# Altium PCB Capstone_Signal_Conditioning_Subsystem_Test_PCB.PcbDoc
Units mm, origin at the board's own origin, x right, y up, seen from the top; angles counter-clockwise.
Board outline 94.23 x 82.3 mm, 2 copper layers (Top Layer, Bottom Layer), stack 0.532 mm thick; 69 components, 68 nets, 259 pads, 87 vias.
Unrouted connection lines stored in the file: 48.
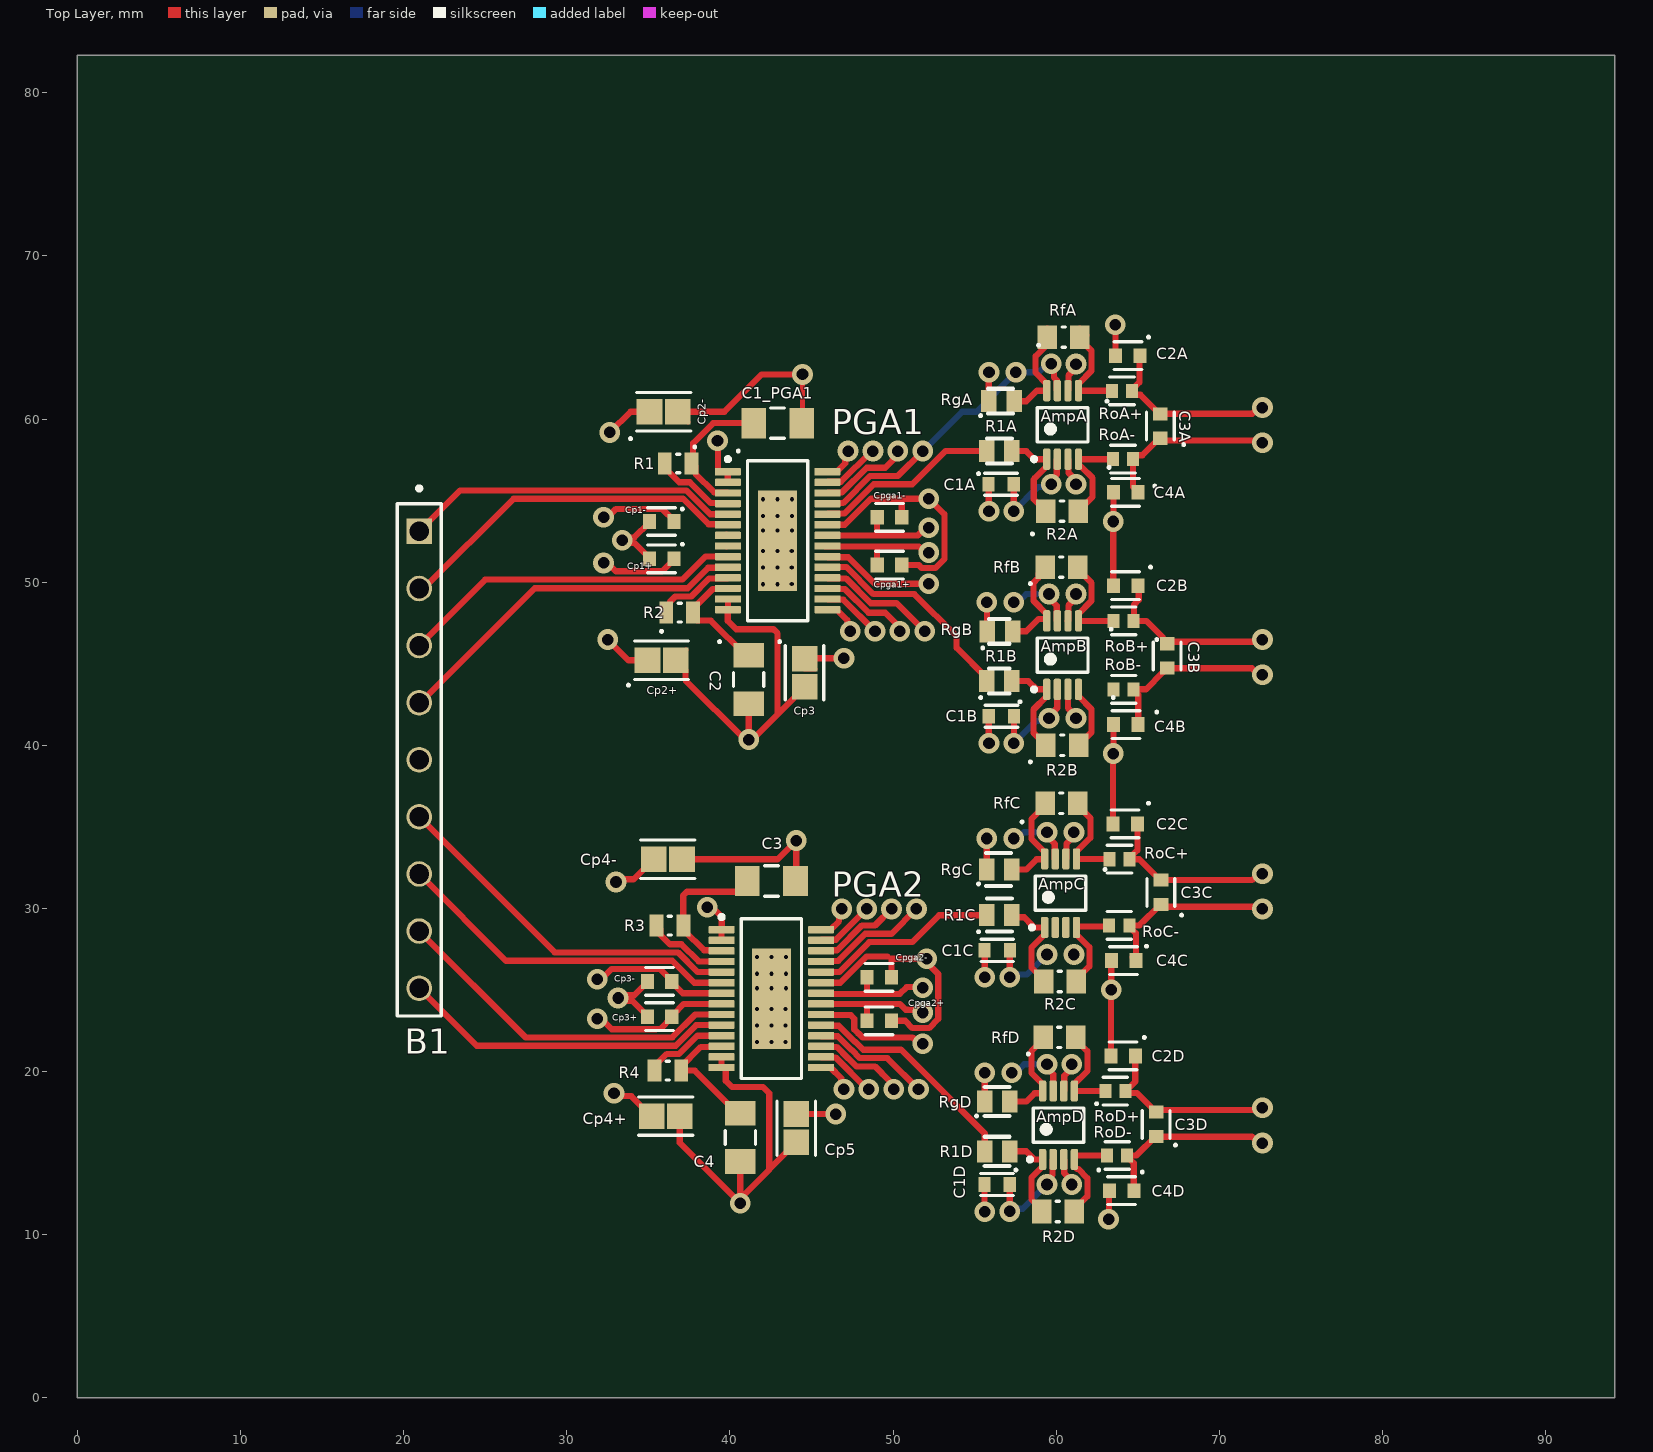
[diagram p0: Top Layer view]
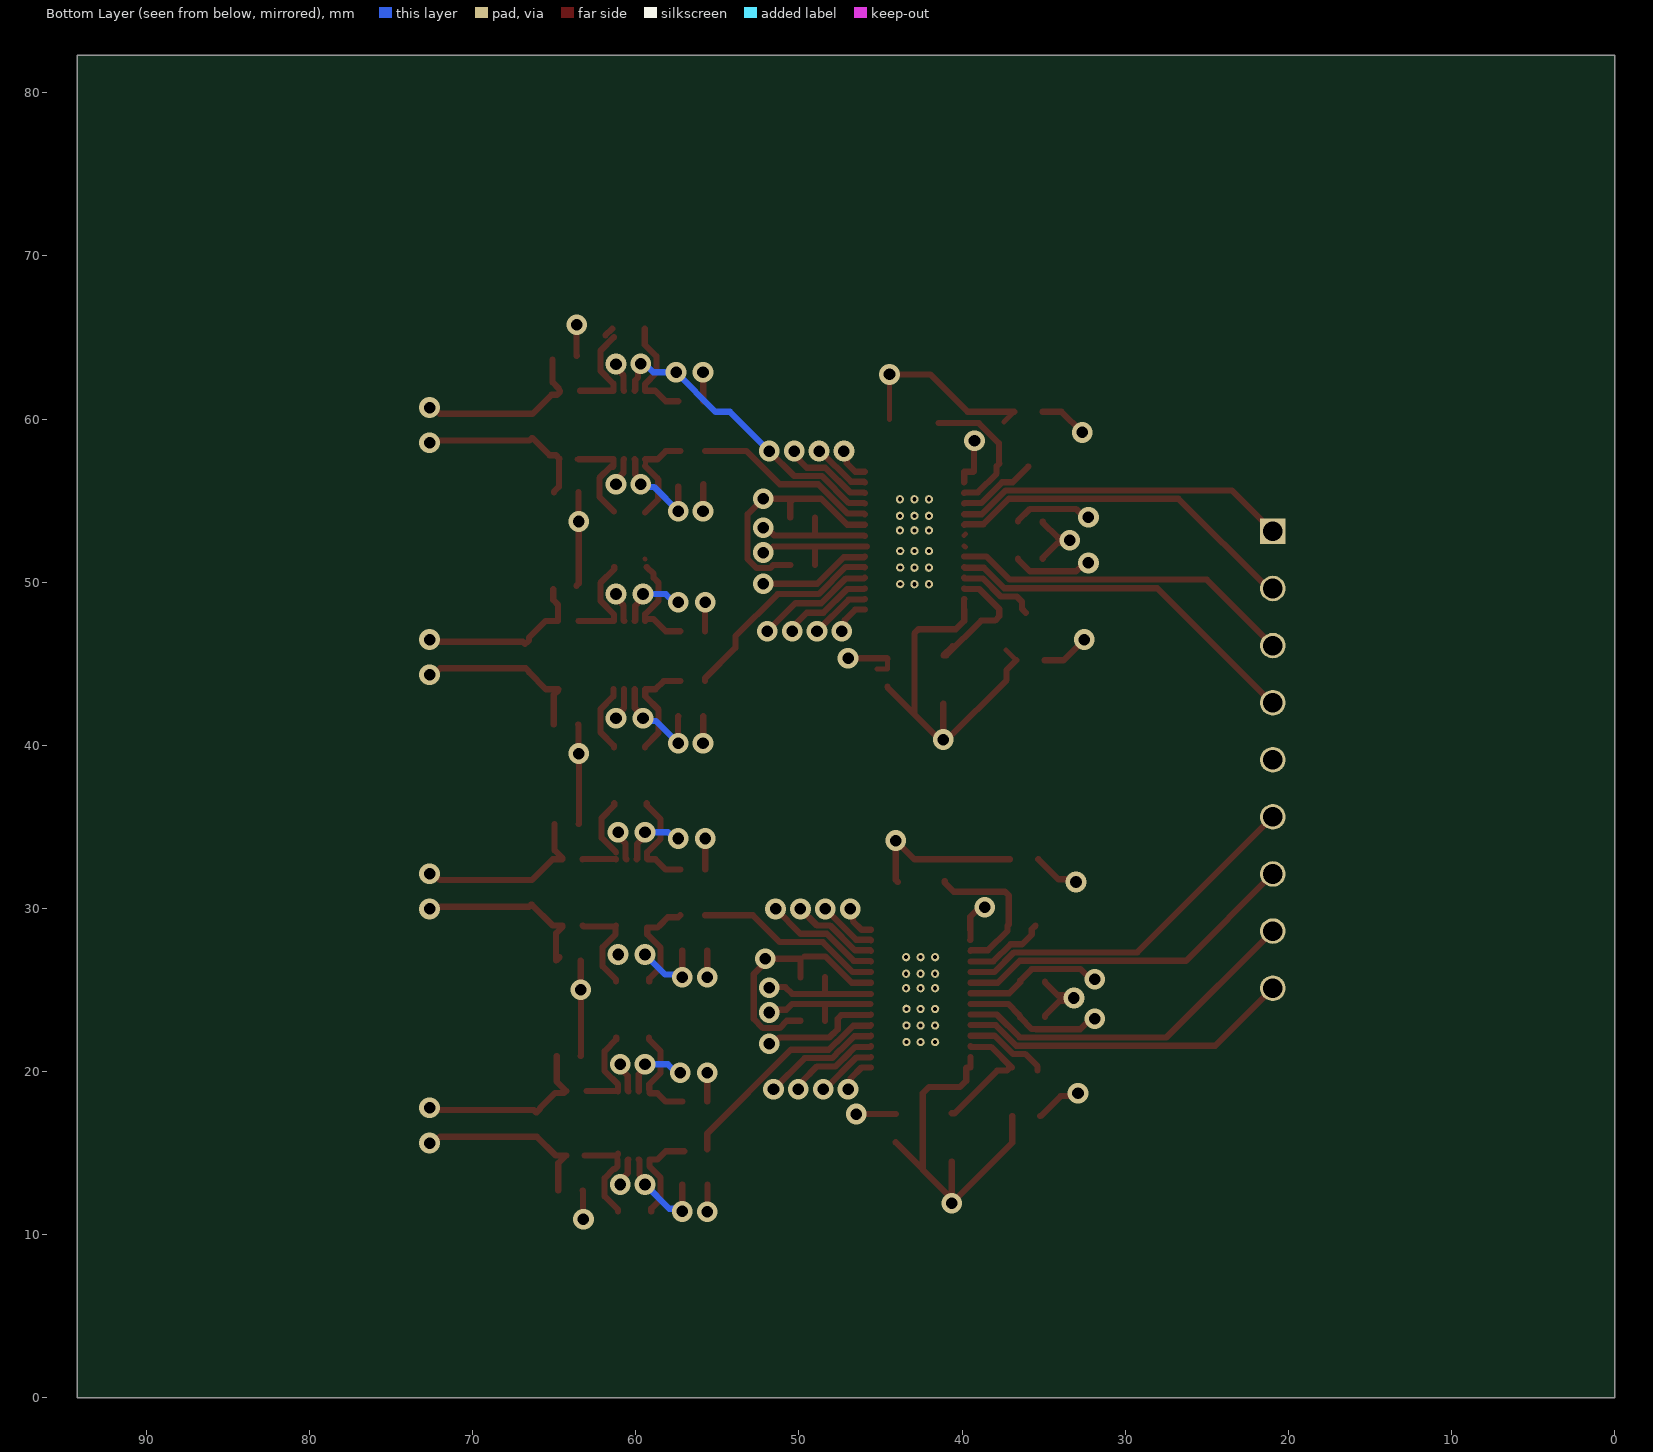
[diagram p1: Bottom Layer view, seen from below]
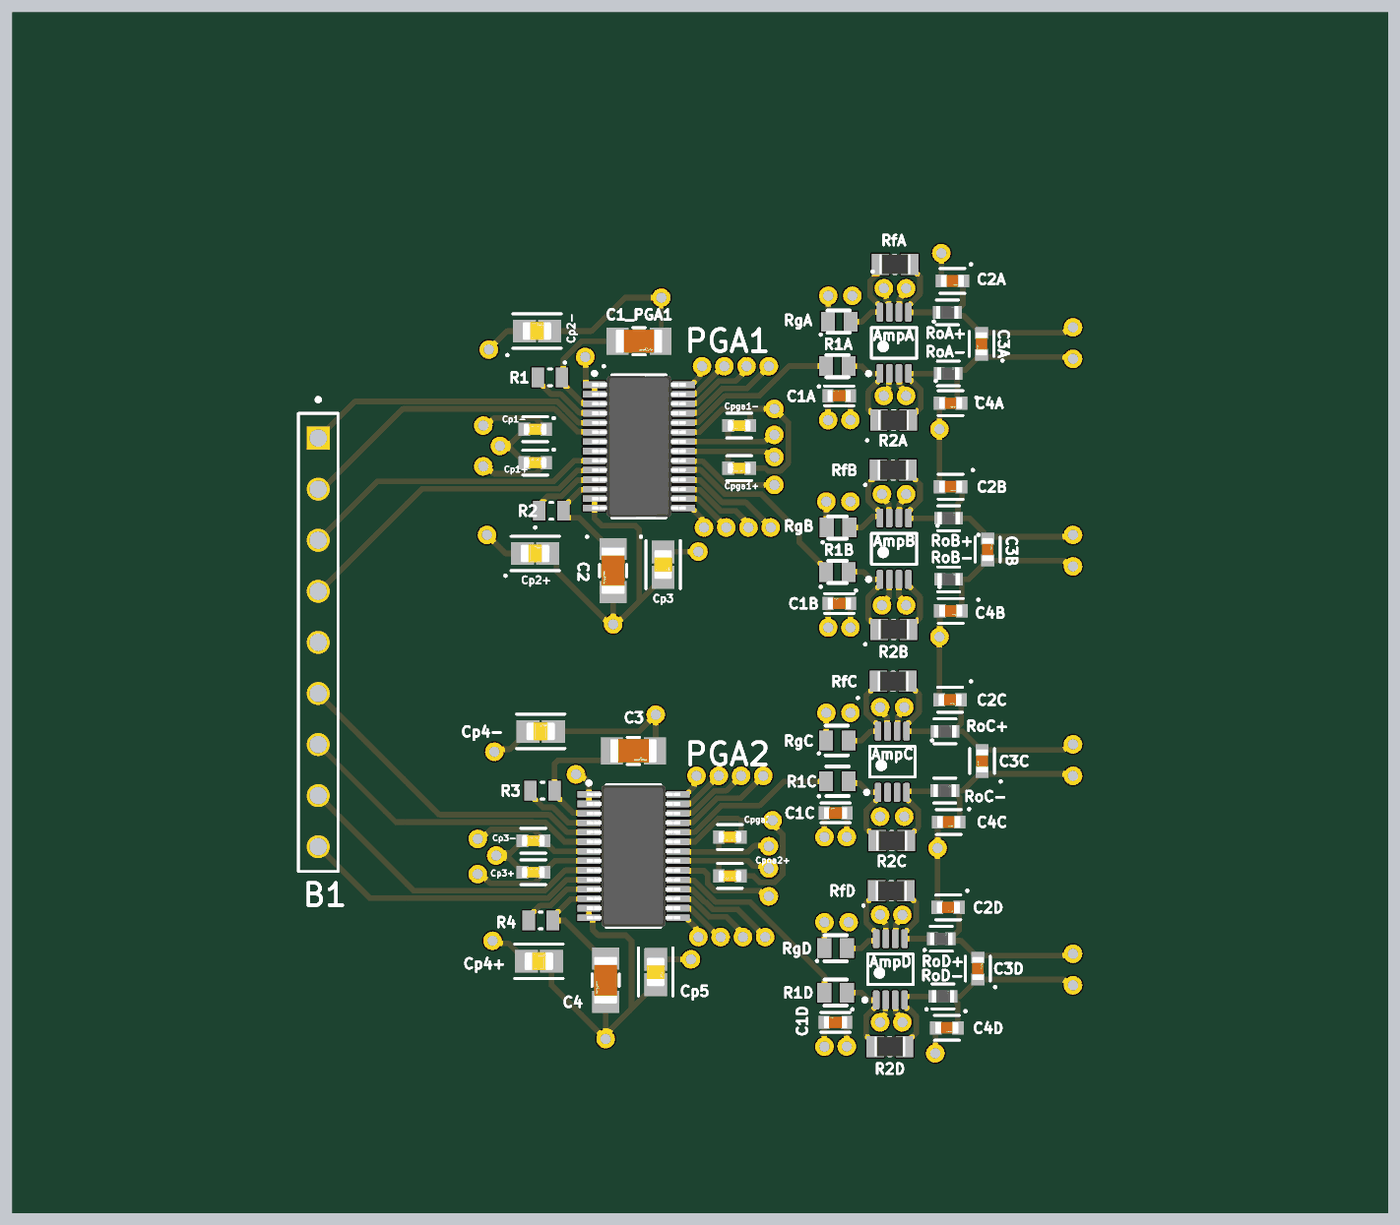
[diagram p2: 3D render of the assembled board from above, using the file's embedded part models]

## Layer stack, top to bottom
Top Solder: solder mask 0.0102, Solder Resist, Dk 3.5
Top Layer: signal copper 0.035
Dielectric 2: prepreg 0.0711, PP-006, Dk 4.1
Dielectric 1: dielectric 0.32, FR-4, Dk 4.8
Dielectric 3: prepreg 0.0711, PP-006, Dk 4.1
Bottom Layer: signal copper 0.035
Bottom Solder: solder mask 0.0102, Solder Resist, Dk 3.5

## Board outline
0,82.296 0,0 94.234,0 94.234,82.296

## Design rules (kind name [scope] priority, off if disabled: settings)
Clearance [All] p1: gap=0.127 ignorepadtopadclearanceinfootprint=FALSE
PolygonConnect [All] p1: connectstyle=Relief reliefconductorwidth=0.254 reliefentries=4 polygonreliefangle="90 Angle" airgapwidth=0.254
RoutingVias [All] p1: holewidth=0.711 width=1.27 viastyle="Through Hole" minholewidth=0.711 minwidth=1.27 maxholewidth=0.711 maxwidth=1.27
SolderMaskExpansion [All] p1: expansion=0.102 istentingtop=FALSE
Width [All] p1: maxlimit=6.35 minlimit=0.152 preferedwidth=0.381 minimp=50.000000 maximp=50.000000 favimp=50.000000
30 further rules are at their usual default settings.

## Classes and differential pairs
component class PGA2: C3 C4 Cp3+ Cp3- Cp4+ Cp4- Cp5 Cpga2+ Cpga2- PGA2 R3 R4
component class Diff_Amp_2: AmpC AmpD C1C C1D C2C C2D C3C C3D C4C C4D R1C R1D R2C R2D RfC RfD RgC RgD RoC+ RoC- RoD+ RoD-
component class PGA1: C1 C1_PGA1 C2 Cp1+ Cp1- Cp2+ Cp2- Cp3 Cpga1+ Cpga1- PGA1 R1 R2
component class Diff_Amp_1: AmpA AmpB C1A C1B C2A C2B C3A C3B C4A C4B R1A R1B R2A R2B RfA RfB RgA RgB RoA+ RoA- RoB+ RoB-
component class Capstone_Signal_Conditioners_Subsystem_Test_Schematic: B1

## Components (designator, comment, footprint, x,y, rotation, side; value= is the part's Value field where it differs from the comment)
AmpA "LTC6362HMS8#PBF" LT-MS8-8_L 60.396,59.641 r90 top
AmpB "LTC6362HMS8#PBF" LT-MS8-8_L 60.396,45.534 r90 top
AmpC "LTC6362HMS8#PBF" LT-MS8-8_L 60.269,30.939 r90 top
AmpD "LTC6362HMS8#PBF" LT-MS8-8_L 60.142,16.715 r90 top
B1 "1945164" FP-4-644456-0-MFG 20.955,39.116 r270 top
C1_PGA1 "GRM3195C1H163JA01D" FP-GRM319-0_15-IPC_A 42.926,59.752 r0 top (schematic designator C1)
C1A "GQM1875C2ER10BB12D" FP-GQM187-0_15-MFG 56.628,56.007 r180 top
C1B "GQM1875C2ER10BB12D" FP-GQM187-0_15-MFG 56.642,41.783 r180 top
C1C "GQM1875C2ER10BB12D" FP-GQM187-0_15-MFG 56.388,27.432 r180 top
C1D "GQM1875C2ER10BB12D" FP-GQM187-0_15-MFG 56.374,13.081 r180 top
C2 "GRM3195C1H163JA01D" FP-GRM319-0_15-IPC_A 41.148,44.036 r270 top
C2A "CC0603KRX7R9BB392" FP-CC0603-DA-MFG 64.389,63.887 r180 top
C2B "CC0603KRX7R9BB392" FP-CC0603-DA-MFG 64.262,49.784 r180 top
C2C "CC0603KRX7R9BB392" FP-CC0603-DA-MFG 64.229,35.185 r180 top
C2D "CC0603KRX7R9BB392" FP-CC0603-DA-MFG 64.102,20.961 r180 top
C3 "GRM3195C1H163JA01D" FP-GRM319-0_15-IPC_A 42.545,31.685 r0 top
C3A "CC0603KRX7R9BB392" FP-CC0603-DA-MFG 66.381,59.573 r90 top
C3B "CC0603KRX7R9BB392" FP-CC0603-DA-MFG 66.802,45.478 r270 top
C3C "CC0603KRX7R9BB392" FP-CC0603-DA-MFG 66.421,30.988 r90 top
C3D "CC0603KRX7R9BB392" FP-CC0603-DA-MFG 66.127,16.764 r270 top
C4 "GRM3195C1H163JA01D" FP-GRM319-0_15-IPC_A 40.64,15.969 r270 top
C4A "CC0603KRX7R9BB392" FP-CC0603-DA-MFG 64.262,55.509 r180 top
C4B "CC0603KRX7R9BB392" FP-CC0603-DA-MFG 64.276,41.275 r180 top
C4C "CC0603KRX7R9BB392" FP-CC0603-DA-MFG 64.135,26.807 r180 top
C4D "CC0603KRX7R9BB392" FP-CC0603-DA-MFG 64.008,12.705 r180 top
Cp1+ "CC0603KRX7R7BB104" FP-CC0603-DA-MFG 35.814,51.435 r180 top value="100 nF"
Cp1- "CC0603KRX7R7BB104" FP-CC0603-DA-MFG 35.814,53.721 r180 top value="100 nF"
Cp2+ "C2012JB1A685K060AC" FP-C2012-060-0_2-IPC_A 35.814,45.212 r0 top
Cp2- "C2012JB1A685K060AC" FP-C2012-060-0_2-IPC_A 35.941,60.452 r0 top
Cp3 "C2012JB1A685K060AC" FP-C2012-060-0_2-IPC_A 44.577,44.45 r270 top
Cp3+ "CC0603KRX7R7BB104" FP-CC0603-DA-MFG 35.687,23.368 r180 top value="100 nF"
Cp3- "CC0603KRX7R7BB104" FP-CC0603-DA-MFG 35.687,25.527 r180 top value="100 nF"
Cp4+ "C2012JB1A685K060AC" FP-C2012-060-0_2-IPC_A 36.068,17.272 r0 top
Cp4- "C2012JB1A685K060AC" FP-C2012-060-0_2-IPC_A 36.195,33.02 r0 top
Cp5 "C2012JB1A685K060AC" FP-C2012-060-0_2-IPC_A 44.069,16.535 r270 top
Cpga1+ "CC0603KRX7R7BB104" FP-CC0603-DA-MFG 49.784,51.054 r0 top value="100 nF"
Cpga1- "CC0603KRX7R7BB104" FP-CC0603-DA-MFG 49.784,53.975 r0 top value="100 nF"
Cpga2+ "CC0603KRX7R7BB104" FP-CC0603-DA-MFG 49.149,23.114 r0 top value="100 nF"
Cpga2- "CC0603KRX7R7BB104" FP-CC0603-DA-MFG 49.149,25.781 r0 top value="100 nF"
PGA1 "THS7002CPWP" THS7002CPWP 42.924,52.544 r0 top locked
PGA2 "THS7002CPWP" THS7002CPWP 42.543,24.477 r0 top locked
R1 "CRCW08050000Z0EA" RESC2013X50X30LL20T20 36.83,57.277 r180 top
R1A "ERJ-6ENF1241V" RESC2013X70X40LL20T20 56.515,58.049 r0 top
R1B "ERJ-6ENF1241V" RESC2013X70X40LL20T20 56.515,43.942 r0 top
R1C "ERJ-6ENF1241V" RESC2013X70X40LL20T20 56.515,29.591 r0 top
R1D "ERJ-6ENF1241V" RESC2013X70X40LL20T20 56.388,15.113 r0 top
R2 "CRCW08050000Z0EA" RESC2013X50X30LL20T20 36.92,48.133 r180 top
R2A "RC0805FR-071KL" RESC2013X60X35ML10T20 60.358,54.356 r0 top
R2B "RC0805FR-071KL" RESC2013X60X35ML10T20 60.371,40.005 r0 top
R2C "RC0805FR-071KL" RESC2013X60X35ML10T20 60.231,25.527 r0 top
R2D "RC0805FR-071KL" RESC2013X60X35ML10T20 60.104,11.43 r0 top
R3 "CRCW08050000Z0EA" RESC2013X50X30LL20T20 36.322,28.956 r180 top
R4 "CRCW08050000Z0EA" RESC2013X50X30LL20T20 36.195,20.066 r180 top
RfA "RC0805FR-071KL" RESC2013X60X35ML10T20 60.452,65.024 r0 top
RfB "RC0805FR-071KL" RESC2013X60X35ML10T20 60.325,50.927 r0 top
RfC "RC0805FR-071KL" RESC2013X60X35ML10T20 60.325,36.449 r0 top
RfD "RC0805FR-071KL" RESC2013X60X35ML10T20 60.198,22.098 r0 top
RgA "ERJ-6ENF1241V" RESC2013X70X40LL20T20 56.642,61.097 r0 top
RgB "ERJ-6ENF1241V" RESC2013X70X40LL20T20 56.555,46.99 r0 top
RgC "ERJ-6ENF1241V" RESC2013X70X40LL20T20 56.515,32.385 r0 top
RgD "ERJ-6ENF1241V" RESC2013X70X40LL20T20 56.388,18.161 r0 top
RoA+ "CRCW060335K7FKEA" FP-CRCW0603-e3-IPC_C 64.041,61.732 r0 top
RoA- "CRCW060335K7FKEA" FP-CRCW0603-e3-IPC_C 64.102,57.541 r0 top
RoB+ "CRCW060335K7FKEA" FP-CRCW0603-e3-IPC_C 64.135,47.625 r0 top
RoB- "CRCW060335K7FKEA" FP-CRCW0603-e3-IPC_C 64.135,43.434 r0 top
RoC+ "CRCW060335K7FKEA" FP-CRCW0603-e3-IPC_C 63.881,33.02 r0 top
RoC- "CRCW060335K7FKEA" FP-CRCW0603-e3-IPC_C 63.867,28.962 r0 top
RoD+ "CRCW060335K7FKEA" FP-CRCW0603-e3-IPC_C 63.627,18.806 r0 top
RoD- "CRCW060335K7FKEA" FP-CRCW0603-e3-IPC_C 63.74,14.859 r0 top

## Footprints (in the part's own frame and the unit in brackets; to place one, negate y for a bottom-side part, rotate by r counter-clockwise, add the part's x,y. Pads: shape width x height; smd on the part's side, far side on the other; paste and mask are expansions set on the pad)
FP-4-644456-0-MFG [mm] "Connector; Header; 8 Position"
  rect 1.566x1.566 hole 1.2 mask+0: 1(-14,0)
  round 1.566 hole 1.2 mask+0: 2(-10.5,0) 3(-7,0) 4(-3.5,0) 5(0,0) 6(3.5,0) 7(7,0) 8(10.5,0) 9(14,0)
  silkscreen extent -16.76,-1.35 15.7,1.35
FP-C2012-060-0_2-IPC_A [mm]
  rect 1.578x1.556 smd paste+0 mask+0: 1(-0.864,0) 2(0.864,0)
  silkscreen extent -1.65,-1.18 1.65,1.18, body extent -2.15,-1.28 2.15,1.28, height 0.25
FP-CC0603-DA-MFG [mm]
  rect 0.8x0.9 smd paste+0 mask+0: 1(-0.75,0) 2(0.75,0)
  silkscreen extent -0.85,-0.85 0.85,0.85, body extent -1.43,-0.82 1.43,0.82, height 0.25
FP-CRCW0603-e3-IPC_C [mm]
  rect 0.735x0.862 smd paste+0 mask+0: 1(-0.615,0) 2(0.615,0)
  silkscreen extent -0.75,-0.85 0.75,0.85, body extent -1.08,-0.58 1.08,0.58, height 0.25
FP-GQM187-0_15-MFG [mm]
  rect 0.75x0.9 smd paste+0 mask+0: 1(-0.775,0) 2(0.775,0)
  silkscreen extent -1,-0.67 1,0.67, body extent -1.25,-0.58 1.25,0.58, height 0.25
FP-GRM319-0_15-IPC_A [mm]
  rect 1.506x1.858 smd paste+0 mask+0: 1(-1.476,0) 2(1.476,0)
  silkscreen extent -0.42,-0.93 0.42,0.93, body extent -2.73,-1.43 2.73,1.43, height 0.25
LT-MS8-8_L [mm] "SOP, 8-Leads, Body 3x3mm, Pitch 0.65mm, IPC High Density"
  rrect50% 1.3x0.45 smd: 1(-2.1,0.975) 2(-2.1,0.325) 3(-2.1,-0.325) 4(-2.1,-0.975) 5(2.1,-0.975) 6(2.1,-0.325) 7(2.1,0.325) 8(2.1,0.975)
  silkscreen extent -2.22,-1.55 1.05,1.87, body extent -1.55,-1.55 1.55,1.55, height 1.1
RESC2013X50X30LL20T20 [mm] "Chip Resistor, 2-Leads, Body 2.00x1.25mm, IPC High Density"
  rect 0.85x1.35 smd: 1(-0.825,0) 2(0.825,0)
  silkscreen extent -0.1,-0.58 0.1,0.58, body extent -1.1,-0.72 1.1,0.72, height 0.5
RESC2013X60X35ML10T20 [mm] "Chip Resistor, 2-Leads, Body 2.1x1.35mm, IPC Low Density"
  rect 1.2x1.45 smd: 1(-1,0) 2(1,0)
  silkscreen extent -0.1,-0.63 0.1,0.63, body extent -1.05,-0.68 1.05,0.67, height 0.6
RESC2013X70X40LL20T20 [mm] "Chip Resistor, 2-Leads, Body 2.00x1.25mm, IPC High Density"
  rect 0.95x1.35 smd: 1(-0.775,0) 2(0.775,0)
  body extent -1.1,-0.72 1.1,0.72, height 0.7
THS7002CPWP [mm] "SOP, 28-leads, Body 4.5x9.8mm, Pitch 0.65mm, Thermal Pad 2.4x6.17mm, IPC Low Density"
  rrect22% 1.6x0.45 smd: 1(-3.05,4.225) 2(-3.05,3.575) 3(-3.05,2.925) 4(-3.05,2.275) 5(-3.05,1.625) 6(-3.05,0.975) 7(-3.05,0.325) 8(-3.05,-0.325) 9(-3.05,-0.975) 10(-3.05,-1.625) 11(-3.05,-2.275) 12(-3.05,-2.925) 13(-3.05,-3.575) 14(-3.05,-4.225) 15(3.05,-4.225) 16(3.05,-3.575) 17(3.05,-2.925) 18(3.05,-2.275) 19(3.05,-1.625) 20(3.05,-0.975) 21(3.05,-0.325) 22(3.05,0.325) 23(3.05,0.975) 24(3.05,1.625) 25(3.05,2.275) 26(3.05,2.925) 27(3.05,3.575) 28(3.05,4.225)
  round 0.508 hole 0.254: 29(-0.889,-2.667) 29(-0.889,-1.651) 29(-0.889,-0.635) 29(-0.889,0.635) 29(-0.889,1.524) 29(-0.889,2.54) 29(0,-2.667) 29(0,-1.651) 29(0,-0.635) 29(0,0.635) 29(0,1.524) 29(0,2.54) 29(0.87,-2.661) 29(0.87,-1.645) 29(0.87,-0.629) 29(0.889,0.635) 29(0.889,1.524) 29(0.889,2.54)
  rrect4% 2.4x6.17 smd: 29(0,0)
  silkscreen extent -3.17,-4.9 1.85,5.12, body extent -3.21,-4.85 3.21,4.85, height 0.98

## Part data
AmpA AmpB AmpC AmpD: library part CMP-0359-00920-2, "Single Channel, Precision, Low Power Differential Operational Amplifier / SAR ADC Driver, RRIO, 180 MHz Typical GBW, 45 V/us Typical SR, 2.8 to 5.25 V, 8-Pin SOP (MS8-8), High Temperature / Automotive, Pb-Free", Linear Technology Part Number=LTC6362, Manufacturer="Linear Technology", Channels (#)=1, ComponentLink1Description="Manufacturer URL", ComponentLink1URL=http://www.linear.com/, ComponentLink2Description=Datasheet, ComponentLink2URL=http://cds.linear.com/docs/en/datasheet/6362fa.pdf, ComponentLink3Description="Package Specification", ComponentLink3URL=http://cds.linear.com/docs/en/packaging/05081610_G_SO8.pdf, DatasheetVersion="Rev. A", GBW (MHz) Typical=180, Is (mA) Typical=0.9, Mounting Technology="Surface Mount", PackageDescription="8-Lead Plastic Small Outline, Body 3.9 x 4.9 mm, Pitch 1.27 mm", PackageReference=LT-MS8-8, PackageVersion="Rev G", PartNumber=LTC6362HMS8#PBF, RevisionNote="URLs updated", RoHS=Pb-Free, SR (V/us) Typical=45, Type=DIFF, Vos (mV) Typical=0.05, Vs Max (V)=5.25, Vs Min (V)=2.8
B1: library part CMP-03369-000038-1, "CONN HEADER VERT 9POS 3.5MM", Current Rating=5A, Manufacturer="TE Connectivity", Manufacturer Part Number=4-644456-0, Temperature="-55°C to +105°C", Temperature Range High=+105°C, Temperature Range Low=-55°C, Voltage Rating=250V, Automotive=No, Category=Conn, ComponentLink2Description=Datasheet, ComponentLink2URL=https://www.te.com/commerce/DocumentDelivery/DDEController?Action=showdoc&DocId=Data+Sheet%7F82056_MTA%7F0818%7Fpdf%7FEnglish%7FENG_DS_82056_MTA_0818.pdf%7F4-644456-0, Conn Gender=Male, Conn Orientation=Vertical, Contact Material=Tin, Device Class L1=Connectors, Device Class L2="Headers and Wire Housings", Device Class L3=unset, Digikey Description="CONN HEADER VERT 10POS 2.54MM", Footprint Url=https://www.te.com/commerce/DocumentDelivery/DDEController?Action=showdoc&DocId=Customer+Drawing%7F644456%7FD2%7Fpdf%7FEnglish%7FENG_CD_644456_D2.pdf%7F4-644456-0, Height=0.408inch, Lead Free=Yes, Mouser Description="Headers & Wire Housings NARROW FLT HDR 10P Straight Post", Number Of Contacts=10, Number of Rows=1, Octopart=https://octopart.com/4-644456-0-te+connectivity-39514173, Package=4-644456-0, Pitch=2.54mm, RoHS=TRUE
C1_PGA1 C2 C3 C4: library part CMP-06035-007665-1, "Chip Multilayer Ceramic Capacitors for General Purpose, 1206, 16000pF, C0G, 30ppm/°C, 5%, 50V", Capacitance=16nF, Case Code (Imperial)=1206, Case Code (Metric)=3216, Dielectric=C0G, Max Operating Temperature=125°C, Min Operating Temperature=-55°C, Package Quantity=4000, Tolerance=5%, Voltage Rating=50V, Case/Package=1206, Depth=1.6mm, Height=0.85mm, Length=3.2mm, Mount="Surface Mount", Packaging="Tape and Reel", Radiation Hardening=No, Termination=SMD/SMT, Thickness=0.037inch, Voltage Rating (DC)=50V, Width=0.063inch
C1A C1B C1C C1D: library part CMP-06035-052255-1, "Ceramic Capacitor 0.1pF ±0.1pF 250VDC C0G 0603 Paper T/R", Capacitance=0.1pF, Case Code (Imperial)=0603, Case Code (Metric)=1608, Dielectric=C0G, Max Operating Temperature=125°C, Min Operating Temperature=-55°C, Package Quantity=4000, Voltage Rating=250V, Case/Package=0603, Depth=0.8mm, Height=0.7mm, Length=1.6mm, Mount="Surface Mount", Packaging="Tape and Reel", Radiation Hardening=No, Termination=SMD/SMT, Thickness=0.031inch, Voltage Rating (DC)=250V, Width=0.031inch
C2A C2B C2C C2D C3A C3B C3C C3D C4A C4B C4C C4D: library part CMP-03422-000635-2, "CAP CER 3900PF 50V X7R 0603", Capacitance=3.9nF, Case Code (Imperial)=0603, Case Code (Metric)=1608, Dielectric=X7R, Dielectric Material=Ceramic, Insulation Resistance=100GR, Max Operating Temperature=125°C, Min Operating Temperature=-55°C, Package Quantity=4000, Tolerance=10%, Voltage=50V, Case/Package=0603, Construction=Flat, Depth=0.8mm, Halogen Free="Halogen Free", Height=0.8mm, Lead Free="Lead Free", Length=1.6mm, Mount="Surface Mount", Number of Pins=2, Packaging="Tape and Reel", Radiation Hardening=No, REACH SVHC="No SVHC", Resistor Type=Ceramic, RoHS Compliant=Yes, Series=CC, Termination=SMD/SMT, Thickness=0.035inch, Voltage Rating=50V, Voltage Rating (DC)=50V, Width=0.8mm
Cp1+ Cp1- Cp3+ Cp3- Cpga1+ Cpga1- Cpga2+ Cpga2-: library part CMP-2000-05002-2, "CAP CER 0.1UF 16V X7R 0603", Capacitance="100 nF", Manufacturer=YAGEO, Package=CC0603-DA, Temperature="-55°C to +125°C", Temperature Characteristic=X7R, Temperature Coefficient=15%, Temperature Range High=+125°C, Temperature Range Low=-55°C, Tolerance=0.1, Voltage="16 V", Automotive=No, Category=Cap, ComponentLink2Description=Datasheet, ComponentLink2URL=http://www.yageo.com/documents/recent/UPY-GPHC_X7R_6.3V-to-50V_18.pdf, Device Class L1="Passive Components", Device Class L2=Capacitors, Device Class L3="Ceramic Capacitors", Digikey Description="CAP CER 0.1UF 16V X7R 0603", Footprint Url=http://www.yageo.com/exep/pages/download/literatures/UPY-C_GEN_24.pdf, Height=0.9mm, Lead Free=Yes, Manufacturer Part Number=CC0603KRX7R7BB104, Material=Ceramic, Mouser Description="Multilayer Ceramic Capacitor, CC Series, 0.1 - F, - 10%, X7R, 16 V, 0603 [1608 Metric]", Octopart=https://octopart.com/cc0603krx7r7bb104-yageo-192941, RoHS=TRUE, Voltage Rating="16 V"
Cp2+ Cp2- Cp3 Cp4+ Cp4- Cp5: library part CMP-08246-004641-1, "Multilayer Ceramic Capacitors 6.8μF ±10% 10V JB SMD 0805", Capacitance=6.8uF, Case Code (Imperial)=2012, Case Code (Metric)=5032, Case/Package=0805, Dielectric Material=Ceramic, Max Operating Temperature=85°C, Min Operating Temperature=-25°C, Package Quantity=4000, Tolerance=10%, Voltage Rating=10V, Lead Free="Lead Free", Length=0.079inch, Mount="Surface Mount", Packaging="Tape and Reel", RoHS Compliant=Yes, Series=C, Thickness=0.028inch, Voltage Rating (DC)=10V, Width=0.049inch
PGA1 PGA2: library part CMP-0988-00132-2, "70-MHz High-Speed Programmable-Gain Amplifier, Dual, 0 to 70 degC, 28-pin SOP (PWP28), Green (RoHS & no Sb/Br)", Manufacturer="Texas Instruments", BW @ Acl(MHz)=100, Code_JEDEC=MO-153, ComponentLink1Description="Manufacturer URL", ComponentLink1URL=http://www.ti.com/, ComponentLink2Description=Datasheet, ComponentLink2URL=http://www.ti.com/general/docs/lit/getliterature.tsp?genericPartNumber=THS7002&fileType=pdf, ComponentLink3Description="Package Specification", ComponentLink3URL=http://www.ti.com/litv/pdf/mpds373, DatasheetVersion=SLOS214C, Disable=TRUE, Eco-Plan="Green (RoHS & no Sb/Br)", Iib(Max)(nA)=6000, Mounting Technology="Surface Mount", Number of Channels=2, PackageDescription="28-Pin Plastic Small Outline, Body 4.4 x 9.7 mm, Pitch 0.65 mm", PackageReference=PWP0028E, PackageVersion="4073225-6/I, 05/2011", PartNumber=THS7002CPWP, Slew Rate(Typ)(V/us)=85, SubFamily="Variable Gain Amplifier", Vio(Max)(mV)=7, Vn at Flatband(Typ)(nV/rtHz)=1.7, Vs(Max)(V)=32, Vs(Min)(V)=9
R1 R2 R3 R4: library part CMP-2001-04896-1, Manufacturer="Vishay Dale", Part Number=CRCW08050000Z0EA
R1A R1B R1C R1D RgA RgB RgC RgD: library part CMP-2001-04406-1, Manufacturer=Panasonic, Part Number=ERJ-6ENF1241V
R2A R2B R2C R2D RfA RfB RfC RfD: library part CMP-2100-03671-1, "Chip Resistor, 1 KOhm, +/- 1%, 125 mW, -55 to 155 degC, 0805 (2012 Metric), RoHS, Tape and Reel", Case Code (Imperial)=0805, Case Code (Metric)=2012, Manufacturer=Yageo, Max Operating Temperature=155degC, Max Power Dissipation=125mW, Min Operating Temperature=-55degC, Package Description="2-Pin Surface Mounted Device, Body 2 x 1.25 mm", Package Quantity=1, Resistance=1KOhm, Temperature Coefficient=100ppm/degreesC, Tolerance=1%, Voltage Rating=150V, Case/Package=0805, Composition=ThickFilm, Datasheet URL=http://www.yageo.com/NewPortal/yageodocoutput?fileName=/pdf/R-Chip/PYu-RC_Group_51_RoHS_L_5.pdf, Datasheet Version="Rev. 5, 10/2016", Depth=1.25mm, Height=0.024inch, Lead Free=LeadFree, Length=0.079inch, Manufacturer URL=http://www.yageo.com/, Military Standard=Not, Number of Pins=2, Number of Terminations=2, Package Reference=0805, Packaging=TapeandReel, Power Rating=125mW, REACH SVHC=Unknown, RoHSCompliant=true, Termination=SMD/SMT, Voltage Rating (DC)=150V, Width=0.049inch
RoA+ RoA- RoB+ RoB- RoC+ RoC- RoD+ RoD-: library part CMP-2000-03264-2, "RES Thick Film, 35.7kΩ, 1%, 0.1W, 100ppm/°C, 0603", Case Code (Imperial)=0603, Case Code (Metric)=1608, Max Operating Temperature=155°C, Max Power Dissipation=100mW, Min Operating Temperature=-55°C, Package Quantity=10, Resistance=35.7kR, Temperature Coefficient=100ppm/°C, Tolerance=1%, Voltage Rating=75V, Case/Package=0603, Composition="Thick Film", Contact Plating=Tin, Depth=0.85mm, Features="Automotive AEC-Q200", Height=0.45mm, Length=1.55mm, Military Standard=Not, Number of Pins=2, Number of Terminations=2, Packaging="Tape and Reel", Power Rating=100mW, Radiation Hardening=No, Termination=Solder, Weight=7.1E-05oz, Width=0.033inch

## Via types
v1: diameter 1.27, hole 0.711, Top Layer to Bottom Layer, 87 vias

## Nets (pads, with @x,y where several pads share a name; then routed paths per layer and width w, separated by ;. In a path a pad name is that pad's centre, name@x,y a point inside that pad or via, vN(x,y) a via of type N, cw(c..) or ccw(c..) an arc to the next point about the centre after c; other vN are vias at no path point)
+5V: AmpA.3 AmpB.3 AmpC.3 AmpD.3 Cp3.1 Cp5.1 PGA1.20 PGA2.20 | length 25.8
  Top Layer w0.305: Cp3.1 44.577,44.677 Cp3.1@45.203,44.677
  Top Layer w0.381: Cp5.1 v1(46.482,17.399) ; Cp3.1 44.602,45.339 v1(46.99,45.339) ; PGA2.20 45.628,23.467 47.402,23.467 47.625,23.244 47.625,22.589 47.87,22.343 47.884,22.343 48.129,22.098 51.194,22.098 51.575,21.717 v1(51.816,21.717) ; PGA1.20 46.009,51.534 47.254,51.534 48.878,49.911 v1(52.197,49.911) ; AmpD.3 60.501,14.581 60.501,13.78 60.96,13.322 v1(60.96,13.081) ; AmpB.3 60.721,42.29 61.214,41.797 v1(61.214,41.656) ; AmpA.3 60.755,57.507 60.755,56.706 61.214,56.248 v1(61.214,56.007)
  other v1: 61.087,27.178
"A GP0": PGA1.28 | length 2.1
  Top Layer w0.381: PGA1.28 46.549,56.769 47.074,57.294 47.074,57.869 v1(47.244,58.039)
"A GP1": PGA1.27 | length 3.6
  Top Layer w0.381: PGA1.27 46.009,56.153 46.804,56.153 48.689,58.039 v1(48.768,58.039)
"A GP2": PGA1.26 | length 5.5
  Top Layer w0.381: PGA1.26 46.009,55.504 46.872,55.504 48.391,57.023 49.517,57.023 50.292,57.798 v1(50.292,58.039)
ADC_CH_A+: C2A.1 C3A.2 RoA+.2 | length 10.6
  Top Layer w0.381: RoA+.2@64.643,61.722 64.643,61.682 64.833,61.492 65.163,61.492 66.331,60.323 C3A.2 72.021,60.323 72.403,60.706 v1@72.517,60.706 ; RoA+.2@64.71,61.849 65.106,62.246 C2A.1@65.106,63.637
  other v1: 72.644,60.706
ADC_CH_A-: C3A.1 C4A.1 RoA-.2 | length 10.8
  Top Layer w0.381: RoA-.2@64.685,57.573 64.894,57.782 65.29,57.782 66.331,58.823 C3A.1 66.519,58.685 72.506,58.685 v1(72.644,58.547) ; RoA-.2 64.717,55.854 65.024,55.547 C4A.1@65.024,55.499
ADC_CH_B+: C2B.1 C3B.1 RoB+.2 | length 10.5
  Top Layer w0.381: C2B.1@65.056,49.574 65.056,48.914 64.77,48.628 64.77,47.625 65.532,47.625 66.542,46.615 66.542,46.438 C3B.1@66.625,46.355 ; C3B.1 66.929,46.355 72.517,46.355 v1(72.644,46.482)
ADC_CH_B-: C3B.2 C4B.1 RoB-.2 | length 10.8
  Top Layer w0.381: RoB-.2 65.508,43.434 66.542,44.468 66.542,44.518 66.752,44.728 C3B.2 71.998,44.728 72.403,44.323 v1(72.644,44.323) ; RoB-.2@64.77,43.351 65.026,43.095 C4B.1
ADC_CH_C+: C2C.1 C3C.2 RoC+.2 | length 11.2
  Top Layer w0.381: C2C.1 64.979,33.566 64.516,33.103 64.516,33.02 65.089,33.02 66.371,31.738 C3C.2 72.01,31.738 72.403,32.131 v1(72.644,32.131)
ADC_CH_C-: C3C.1 C4C.1 RoC-.2 | length 11.4
  Top Layer w0.381: C4C.1@64.675,27.017 C4C.1 64.885,28.495 64.516,28.864 64.516,28.956 65.089,28.956 66.371,30.238 C3C.1 66.554,30.105 72.511,30.105 v1(72.644,29.972)
ADC_CH_D+: C2D.1 C3D.1 RoD+.2 | length 11.5
  Top Layer w0.381: RoD+.2 RoD+.2@64.272,18.806 ; C2D.1 64.852,19.386 RoD+.2@64.272,18.806 ; v1(72.644,17.78) 72.511,17.647 66.26,17.647 C3D.1 66.077,17.514 65.868,17.724 65.868,17.774 64.958,18.683 64.419,18.683 64.296,18.806 RoD+.2@64.272,18.806
ADC_CH_D-: C3D.2 C4D.1 RoD-.2 | length 11.2
  Top Layer w0.381: RoD-.2@64.262,14.859 64.292,14.859 64.758,14.393 C4D.1 ; RoD-.2 64.922,14.859 C3D.2@66.065,16.002 ; C3D.2 72.01,16.014 72.403,15.621 v1(72.644,15.621)
"B GP0": PGA1.15 | length 2.2
  Top Layer w0.381: PGA1.15 46.549,48.319 47.201,47.667 47.201,47.16 v1(47.371,46.99)
"B GP1": PGA1.16 | length 3.8
  Top Layer w0.254: PGA1.16@45.924,49.003 PGA1.16@45.937,48.99
  Top Layer w0.381: PGA1.16 46.009,48.934 46.951,48.934 v1(48.895,46.99)
"B GP2": PGA1.17 | length 5.7
  Top Layer w0.381: PGA1.17 46.009,49.584 47.049,49.584 48.501,48.133 49.517,48.133 50.419,47.231 v1(50.419,46.99)
C_GP0: PGA2.28 | length 2
  Top Layer w0.381: PGA2.28 46.168,28.702 46.693,29.227 46.693,29.675 v1@46.863,29.845
  other v1: 46.863,29.972
C_GP1: PGA2.27 | length 3.7
  Top Layer w0.381: PGA2.27 45.628,28.086 46.501,28.086 v1(48.387,29.972) v1@48.308,29.972
C_GP2: PGA2.26 | length 5.4
  Top Layer w0.381: PGA2.26 45.628,27.437 46.57,27.437 48.089,28.956 48.895,28.956 v1(49.911,29.972)
D_GP0: PGA2.15 | length 2.2
  Top Layer w0.381: PGA2.15 46.168,20.252 46.82,19.6 46.82,19.093 v1(46.99,18.923)
D_GP1: PGA2.16 | length 3.7
  Top Layer w0.381: PGA2.16 45.628,20.867 46.473,20.867 48.417,18.923 v1(48.514,18.923)
D_GP2: PGA2.17 | length 5.7
  Top Layer w0.381: PGA2.17 45.628,21.517 46.541,21.517 47.239,20.819 47.253,20.819 47.752,20.32 48.895,20.32 49.329,19.886 49.329,19.872 50.038,19.164 v1(50.038,18.923)
GND: AmpA.6 AmpB.6 AmpC.6 AmpD.6 C1_PGA1.2 C1A.2 C1B.2 C1C.2 C1D.2 C2.2 C2A.2 C2B.2 C2C.2 C2D.2 C3.2 C4.2 C4A.2 C4B.2 C4C.2 C4D.2 Cp1+.2 Cp1-.2 Cp2+.2 Cp2-.2 Cp3+.2 Cp3-.2 Cp3.2 Cp4+.2 Cp4-.2 Cp5.2 Cpga1+.2 Cpga1-.2 Cpga2+.2 Cpga2-.2 PGA1.1 PGA1.2 PGA1.13 PGA1.14 PGA1.23 PGA2.1 PGA2.2 PGA2.13 PGA2.14 PGA2.23 RgA.1 RgB.1 RgC.1 RgD.1 | length 158
  Top Layer w0.305: Cp2+.2 Cp2+.2@37.304,45.838 ; Cp2-.2 Cp2-.2@37.431,59.826 ; C1_PGA1.2@44.45,59.959 v1(44.45,62.738)
  Top Layer w0.381: Cp3+.2@34.925,23.368 34.925,23.43 34.014,24.341 33.317,24.341 v1(33.147,24.511) 33.317,24.681 34.141,24.681 34.925,25.465 Cp3-.2@34.925,25.527 ; Cp1+.2@35.052,51.435 35.052,51.497 34.141,52.408 33.571,52.408 v1(33.401,52.578) 33.571,52.748 34.141,52.748 35.052,53.659 Cp1-.2@35.052,53.721 ; Cp2+.2 36.689,45.212 37.277,44.624 37.277,44.003 40.927,40.353 v1(41.151,40.353) ; Cp2-.2 39.664,60.452 41.95,62.738 v1(44.45,62.738) ; Cp4+.2@36.943,17.272 Cp4+.2 36.932,15.646 v1(40.64,11.938) ; Cp4-.2 42.926,33.02 v1(44.069,34.163) 44.069,31.75 C3.2@43.942,31.623 ; v1(38.608,30.075) 38.778,29.905 39.091,29.905 39.497,29.499 PGA2.1@39.497,28.702 ; v1(39.243,58.674) 39.278,58.639 39.278,56.804 39.313,56.769 PGA1.1 39.874,56.138 PGA1.2@39.878,56.134 ; PGA2.14 39.716,20.252 39.751,20.217 39.751,19.431 40.132,19.05 42.037,19.05 42.418,18.669 42.418,14.097 ; PGA2.14@39.493,20.324 PGA2.13 ; PGA2.1 39.493,28.071 PGA2.2@39.497,28.067 ; PGA1.14 39.874,47.629 40.386,47.117 42.672,47.117 42.926,46.863 42.926,42.037 ; PGA1.13 39.878,48.965 PGA1.14@39.878,48.387 ; C4.2 v1(40.64,11.938) ; v1@41.118,40.386 41.388,40.386 44.577,43.575 Cp3.2 ; C2.2 41.151,42.556 v1@41.151,40.523 ; Cp5.2 44.069,15.66 40.81,12.401 40.81,12.108 v1(40.64,11.938) ; PGA2.23 46.771,25.452 48.37,27.051 49.657,27.051 ; PGA1.23 47.043,53.519 48.642,55.118 50.311,55.118 ; Cpga2+.2 50.747,23.114 51.191,22.669 52.211,22.669 52.768,23.227 52.768,25.985 51.943,26.81 v1@51.943,26.924 ; Cpga2-.2@49.911,25.781 49.911,26.924 v1(52.07,26.924) ; Cpga1+.2 51.572,51.054 51.763,50.863 52.592,50.863 53.149,51.421 53.149,54.165 v1(52.197,55.118) 50.311,55.118 ; Cpga1-.2 50.534,54.895 50.311,55.118 ; C1D.2 55.613,13.068 55.613,11.443 v1@55.626,11.43 ; RgD.1 55.62,18.167 55.62,19.933 v1(55.626,19.939) ; C1C.2 55.62,27.426 55.62,25.787 v1(55.626,25.781) ; RgC.1@55.753,32.385 55.747,32.391 55.747,34.284 v1(55.753,34.29) ; RgB.1@55.753,46.99 55.767,47.004 55.767,48.754 v1(55.753,48.768) ; C1A.2 55.867,55.994 55.867,54.358 v1(55.88,54.345) ; C1B.2 55.874,41.777 55.874,40.138 v1(55.88,40.132) ; RgA.1 55.874,61.104 55.874,62.859 v1(55.88,62.865) ; AmpD.6@60.452,18.796 60.501,18.845 60.501,19.748 60.96,20.206 v1(60.96,20.447) ; AmpC.6@60.579,33.02 60.628,33.069 60.628,33.972 61.087,34.43 v1(61.087,34.671) ; AmpB.6@60.706,47.625 60.755,47.674 60.755,48.577 61.214,49.035 v1(61.214,49.276) ; AmpA.6 60.755,61.776 60.755,62.674 61.214,63.132 v1(61.214,63.373) ; v1@63.246,10.922 63.236,10.932 63.236,12.682 C4D.2 ; C2D.2@63.373,20.955 63.363,20.965 63.363,25.009 v1(63.373,25.019) 63.379,25.025 63.379,26.801 C4C.2 ; C2C.2@63.5,35.179 63.49,35.189 63.49,39.487 v1(63.5,39.497) 63.513,39.51 63.513,41.262 C4B.2 ; C4A.2 63.506,55.503 63.506,53.727 v1(63.5,53.721) 63.5,49.923 C2B.2@63.639,49.784 ; C2A.2@63.627,63.881 63.633,63.887 63.633,65.78 v1(63.627,65.786)
  other v1: 63.213,10.959 55.626,11.419
NetAmpA_1: AmpA.1 R1A.2 R2A.1 | length 6.3
  Top Layer w0.305: AmpA.1@59.421,57.116 AmpA.1
  Top Layer w0.381: R1A.2@57.277,58.039 58.166,58.039 58.664,57.541 AmpA.1 ; AmpA.1@59.421,57.116 58.674,56.369 58.674,56.335 58.623,56.285 58.623,55.088 R2A.1@59.436,54.276
NetAmpA_2: AmpA.2 C1A.1 | length 6.2
  Top Layer w0.305: AmpA.2 AmpA.2@60.094,57.518
  Top Layer w0.381: v1(57.404,54.356) C1A.1@57.404,55.869 ; v1(59.69,56.007) 59.69,56.248 60.036,56.594 60.036,57.507 AmpA.2
  Bottom Layer w0.381: v1(57.404,54.356) 58.885,55.837 59.52,55.837 v1(59.69,56.007)
NetAmpA_4: AmpA.4 R2A.2 RoA-.1 | length 6.3
  Top Layer w0.254: RoA-.1@63.5,57.541 RoA-.1@63.627,57.541
  Top Layer w0.381: R2A.2@61.341,54.337 62.23,55.226 62.23,56.388 61.536,57.082 61.406,57.082 61.371,57.116 AmpA.4 RoA-.1 63.49,57.541 RoA-.1@63.5,57.531
NetAmpA_5: AmpA.5 RfA.2 RoA+.1 | length 6.6
  Top Layer w0.381: RfA.2@61.341,65.024 61.341,65.01 62.166,64.185 62.166,62.962 61.371,62.166 AmpA.5 ; AmpA.5@61.406,61.732 RoA+.1 ; RfA.2@61.452,65.542 RfA.2@61.862,65.133
NetAmpA_8: AmpA.8 RfA.1 RgA.2 | length 6.7
  Top Layer w0.381: RgA.2@57.404,61.087 58.166,61.087 58.82,61.741 AmpA.8 ; AmpA.8@59.436,61.741 59.436,62.151 58.737,62.85 58.737,63.846 59.452,64.56 RfA.1@59.452,65.542
NetAmpB_1: AmpB.1 R1B.2 R2B.1 | length 6.6
  Top Layer w0.381: R1B.2@57.277,43.942 R1B.2 58.293,43.942 58.801,43.434 AmpB.1 59.421,43.009 58.61,42.199 58.61,40.764 59.436,39.938 R2B.1@59.436,39.878
NetAmpB_2: AmpB.2 C1B.1 | length 6.4
  Top Layer w0.381: v1(57.404,40.132) 57.41,40.138 57.41,41.777 C1B.1@57.404,41.783 ; v1(59.563,41.656) 59.563,41.782 60.071,42.29 AmpB.2
  Bottom Layer w0.381: v1(57.404,40.132) 58.758,41.486 59.393,41.486 v1(59.563,41.656)
NetAmpB_4: AmpB.4 R2B.2 RoB-.1 | length 4.2
  Top Layer w0.381: R2B.2@61.341,39.878 61.341,39.973 62.166,40.798 62.166,42.213 61.371,43.009 AmpB.4
NetAmpB_5: AmpB.5 RfB.2 RoB+.1 | length 6.2
  Top Layer w0.381: RfB.2 61.325,50.802 62.166,49.961 62.166,48.854 61.341,48.029 AmpB.5@61.341,47.634 ; AmpB.5@61.341,47.625 61.345,47.629 63.515,47.629 RoB+.1
NetAmpB_8: AmpB.8 RfB.1 RgB.2 | length 6.5
  Top Layer w0.254: RfB.1@59.421,51.404 RfB.1@59.452,51.435
  Top Layer w0.381: RgB.2@57.277,46.99 RgB.2 58.166,46.99 58.928,47.752 59.386,47.752 59.421,47.717 AmpB.8 ; RfB.1 58.915,50.517 58.915,50.279 58.61,49.974 58.61,48.869 59.436,48.044 AmpB.8@59.436,47.634
NetAmpC_1: AmpC.1 R1C.2 R2C.1 | length 6.3
  Top Layer w0.381: R1C.2@57.277,29.591 57.404,29.464 58.039,29.464 58.547,28.956 58.664,28.839 AmpC.1 59.294,28.414 58.483,27.604 58.483,26.399 59.182,25.701 R2C.1@59.182,25.527
NetAmpC_2: AmpC.2 C1C.1 | length 4.5
  Top Layer w0.381: v1(57.15,25.781) 57.156,25.787 57.156,27.426 C1C.1
  Bottom Layer w0.381: v1(57.15,25.781) 57.32,25.951 58.209,25.951 v1(59.436,27.178)
NetAmpC_4: AmpC.4 R2C.2 RoC-.1 | length 6.1
  Top Layer w0.381: R2C.2@61.214,25.527 61.214,25.635 62.039,26.461 62.039,27.619 61.244,28.414 AmpC.4 ; AmpC.4@61.214,28.956 61.27,28.9 63.191,28.9 RoC-.1
NetAmpC_5: AmpC.5 RfC.2 RoC+.1 | length 5.8
  Top Layer w0.381: AmpC.5@61.214,33.02 61.224,33.03 63.256,33.03 RoC+.1 ; AmpC.5@61.214,33.434 62.103,34.323 62.103,35.546 61.325,36.324 RfC.2
NetAmpC_8: AmpC.8 RfC.1 RgC.2 | length 6.4
  Top Layer w0.381: RgC.2@57.277,32.385 RgC.2 58.166,32.385 58.801,33.02 59.275,33.02 AmpC.8 ; AmpC.8@59.309,33.039 59.309,33.449 58.483,34.275 58.483,35.483 59.325,36.324 RfC.1
NetAmpD_1: AmpD.1 R1D.2 R2D.1 | length 6.1
  Top Layer w0.381: R1D.2@57.036,15.113 58.166,15.113 58.674,14.605 59.157,14.605 AmpD.1 59.167,14.19 58.483,13.507 58.483,12.175 59.055,11.604 R2D.1@59.055,11.43 ; R1D.2@57.15,15.113 R1D.2
NetAmpD_2: AmpD.2 C1D.1 | length 6.3
  Top Layer w0.381: v1(57.15,11.43) C1D.1 ; v1(59.436,13.081) 59.436,13.322 59.782,13.668 59.782,14.581 AmpD.2
  Bottom Layer w0.381: v1(57.15,11.43) 57.32,11.6 57.955,11.6 v1(59.436,13.081)
NetAmpD_4: AmpD.4 R2D.2 RoD-.1 | length 6
  Top Layer w0.381: R2D.2@61.087,11.43 61.087,11.538 61.912,12.364 61.912,13.476 61.355,14.034 61.274,14.034 61.117,14.19 AmpD.4 ; AmpD.4@61.087,14.986 61.087,14.924 61.152,14.859 RoD-.1
NetAmpD_5: AmpD.5 RfD.2 RoD+.1 | length 5.9
  Top Layer w0.381: AmpD.5@61.087,18.796 61.102,18.811 63.007,18.811 RoD+.1 ; AmpD.5@61.087,18.815 61.087,19.21 61.912,20.036 61.912,21.259 61.198,21.973 RfD.2
NetAmpD_8: AmpD.8 RfD.1 RgD.2 | length 6.1
  Top Layer w0.381: RgD.2@57.15,18.161 RgD.2 58.166,18.161 58.674,18.669 59.132,18.669 59.167,18.704 AmpD.8 ; AmpD.8@59.182,18.923 59.182,19.225 58.483,19.924 58.483,21.259 59.198,21.973 RfD.1
NetC1_PGA1_1: C1_PGA1.1 PGA1.3 R1.1 | length 8.6
  Top Layer w0.381: PGA1.3 39.839,55.504 39.044,55.504 37.89,56.658 37.89,57.106 37.719,57.277 37.745,57.303 37.745,58.523 38.974,59.752 C1_PGA1.1
NetC2_1: C2.1 PGA1.12 R2.1 | length 8.2
  Top Layer w0.381: R2.1@37.719,48.006 37.719,47.909 37.979,47.649 38.835,47.649 40.972,45.512 C2.1 C2.1@40.586,46.074 ; R2.1@37.719,48.133 37.719,48.357 38.946,49.584 39.839,49.584 PGA1.12
NetC3_1: C3.1 PGA2.3 R3.1 | length 9.2
  Top Layer w0.381: R3.1@37.147,29.019 37.147,30.804 37.37,31.027 40.506,31.027 41.069,31.59 C3.1 ; R3.1@37.211,28.956 37.211,28.642 38.416,27.437 39.458,27.437 PGA2.3
NetC4_1: C4.1 PGA2.12 R4.1 | length 7.9
  Top Layer w0.381: PGA2.12 39.458,21.517 38.221,21.517 36.957,20.253 37.068,20.253 37.255,20.066 37.843,20.066 40.464,17.445 C4.1
NetPGA1_4: PGA1.4 R1.2 | length 4.9
  Top Layer w0.381: R1.2@35.941,57.091 36.898,56.134 37.548,56.134 38.829,54.853 39.839,54.853 PGA1.4
NetPGA1_11: PGA1.11 R2.2 | length 4.9
  Top Layer w0.381: R2.2 36.329,48.368 36.329,48.799 36.656,49.125 37.625,49.125 38.734,50.234 39.839,50.234 PGA1.11
NetPGA2_4: PGA2.4 R3.2 | length 5.1
  Top Layer w0.381: R3.2 35.732,28.721 35.732,28.403 36.322,27.813 37.03,27.813 38.091,26.752 PGA2.4
NetPGA2_11: PGA2.11 R4.2 | length 5.2
  Top Layer w0.381: R4.2 35.37,20.316 36.136,21.082 36.887,21.082 38.007,22.202 PGA2.11
PGA_A_Out: PGA1.24 R1A.1 | length 11.4
  Top Layer w0.381: PGA1.24 46.009,54.204 47.009,54.204 48.812,56.007 51.181,56.007 53.223,58.049 R1A.1
PGA_B_Out: PGA1.19 R1B.1 | length 13.2
  Top Layer w0.254: PGA1.19@45.924,50.953 PGA1.19@45.95,50.927
  Top Layer w0.381: PGA1.19 45.995,50.94 47.13,50.94 48.795,49.276 51.308,49.276 53.897,46.687 53.897,45.985 55.753,44.129 R1B.1@55.753,43.942
PGA_C_Out: PGA2.24 R1C.1 | length 11.6
  Top Layer w0.381: PGA2.24 46.703,26.102 48.541,27.94 51.173,27.94 52.824,29.591 R1C.1 R1C.1@55.753,29.591
PGA_D_Out: PGA2.19 R1D.1 | length 13.8
  Top Layer w0.381: PGA2.19 45.628,22.817 46.678,22.817 47.66,21.835 47.673,21.835 48.173,21.336 50.496,21.336 55.626,16.206 R1D.1@55.626,15.24
"Sensor A (+)": B1.2 PGA1.6 | length 21.8
  Top Layer w0.381: B1.2@20.996,49.616 21.238,49.616 26.74,55.118 37.128,55.118 38.692,53.553 39.839,53.553 PGA1.6
"Sensor A (-)": B1.1 PGA1.5 | length 20.6
  Top Layer w0.381: B1.1 23.465,55.626 37.338,55.626 38.795,54.169 PGA1.5
"Sensor B (+)": B1.3 PGA1.9 | length 21.2
  Top Layer w0.381: B1.3 24.998,50.159 37.093,50.159 38.502,51.569 PGA1.9
"Sensor B (-)": B1.4 PGA1.10 | length 22.3
  Top Layer w0.381: B1.4@21.026,42.616 28.043,49.633 37.415,49.633 38.666,50.884 39.839,50.884 PGA1.10
"Sensor C (+)": B1.7 PGA2.6 | length 21.3
  Top Layer w0.381: B1.7@20.955,32.004 21.067,32.004 26.268,26.803 35.679,26.803 35.684,26.797 36.466,26.797 37.811,25.452 PGA2.6
"Sensor C (-)": B1.6 PGA2.5 | length 22.5
  Top Layer w0.381: B1.6@20.955,35.56 21.011,35.56 29.26,27.311 35.889,27.311 35.895,27.305 36.819,27.305 38.022,26.102 PGA2.5
"Sensor D (+)": B1.8 PGA2.9 | length 21.8
  Top Layer w0.381: B1.8@20.955,28.575 20.996,28.575 27.479,22.092 35.679,22.092 35.684,22.098 36.466,22.098 37.87,23.502 PGA2.9
"Sensor D (-)": B1.9 PGA2.10 | length 20.5
  Top Layer w0.381: B1.9@20.955,25.019 21.052,25.019 24.487,21.584 35.889,21.584 35.895,21.59 36.676,21.59 37.938,22.852 PGA2.10
SHDN-A: AmpA.7 PGA1.25 | length 19.1
  Top Layer w0.381: PGA1.25 46.009,54.853 46.94,54.853 48.602,56.515 50.304,56.515 51.816,58.027 v1(51.816,58.039) ; v1@59.69,63.373 59.86,63.203 59.86,62.56 60.036,62.384 60.036,61.776 AmpA.7
  Bottom Layer w0.381: v1(51.816,58.039) 54.229,60.452 55.118,60.452 v1(57.531,62.865) 58.931,62.865 59.449,63.383 v1(59.69,63.383)
SHDN-B: AmpB.7 PGA1.18 | length 11.6
  Top Layer w0.381: PGA1.18 46.009,50.234 47.118,50.234 48.639,48.713 50.22,48.713 v1(51.943,46.99) ; v1(59.563,49.276) 59.563,49.035 60.036,48.562 60.036,47.66 AmpB.7@60.071,47.625
  Bottom Layer w0.381: v1(57.404,48.768) 57.645,48.768 58.153,49.276 v1(59.563,49.276)
SHDN-C: AmpC.7 PGA2.25 | length 11.2
  Top Layer w0.381: PGA2.25 45.628,26.786 46.638,26.786 48.3,28.448 49.911,28.448 v1(51.435,29.972) ; v1(59.436,34.671) 59.436,34.43 59.909,33.957 59.909,33.055 AmpC.7@59.944,33.02
  Bottom Layer w0.381: v1(57.404,34.29) 57.645,34.29 58.026,34.671 v1(59.436,34.671)
SHDN-D: AmpD.7 PGA2.18 | length 11.5
  Top Layer w0.381: PGA2.18 45.628,22.167 46.61,22.167 47.45,21.327 47.463,21.327 47.962,20.828 49.657,20.828 v1(51.562,18.923) ; v1(59.436,20.457) 59.436,20.217 59.817,19.836 AmpD.7 AmpD.7@59.817,18.796
  Bottom Layer w0.381: v1(57.277,19.939) 57.518,19.939 58.036,20.457 v1(59.436,20.457)
VCC+: Cp1+.1 Cp2+.1 Cp3+.1 Cp4+.1 Cpga1+.1 Cpga2+.1 PGA1.8 PGA1.21 PGA2.8 PGA2.21 | length 34.4
  Top Layer w0.305: Cp2+.1@34.925,45.187 Cp2+.1 ; PGA1.8@39.801,52.146 PGA1.8
  Top Layer w0.381: v1(31.877,23.241) 32.118,23.241 32.758,22.6 35.469,22.6 35.474,22.606 35.725,22.606 36.449,23.33 Cp3+.1@36.449,23.406 ; v1(32.258,51.181) 32.499,51.181 33.012,50.667 35.846,50.667 36.576,51.397 Cp1+.1@36.576,51.435 ; v1(32.512,46.482) 33.782,45.212 Cp2+.1 ; v1(32.893,18.669) 33.063,18.499 33.966,18.499 35.193,17.272 Cp4+.1 ; Cp3+.1@36.514,23.495 37.171,24.152 PGA2.8 ; PGA2.21@45.615,24.152 48.399,24.152 ; PGA1.21@45.847,52.197 49.022,52.197 ; Cpga2+.1 48.399,24.152 ; Cpga1+.1@49.022,51.054 49.022,52.197 ; v1(51.816,23.622) 51.646,23.792 50.779,23.792 50.419,24.152 48.399,24.152 ; v1(52.197,51.816) 51.956,51.816 51.575,52.197 49.022,52.197
VCC-: Cp1-.1 Cp2-.1 Cp3-.1 Cp4-.1 Cpga1-.1 Cpga2-.1 PGA1.7 PGA1.22 PGA2.7 PGA2.22 | length 34.3
  Top Layer w0.305: PGA1.7@39.801,52.942 PGA1.7
  Top Layer w0.381: v1(31.877,25.654) 32.118,25.654 32.758,26.295 35.469,26.295 35.474,26.289 35.725,26.289 36.449,25.565 36.449,25.489 36.437,25.477 37.112,24.802 PGA2.7 ; v1(32.258,53.975) 32.499,53.975 33.012,54.489 35.846,54.489 36.576,53.759 Cp1-.1@36.576,53.721 ; v1(32.639,59.182) 33.909,60.452 Cp2-.1 ; v1(33.02,31.623) 33.19,31.793 34.093,31.793 35.32,33.02 Cp4-.1 ; PGA2.22@45.593,24.765 48.399,24.765 ; PGA1.22@45.974,52.832 46.011,52.869 49.022,52.869 ; Cpga2-.1 48.399,24.765 ; Cpga1-.1@49.022,53.848 49.022,52.869 ; Cpga1-.1@49.022,53.913 Cpga1-.1@49.022,53.975 ; v1(51.816,25.146) 51.78,25.182 50.836,25.182 50.419,24.765 48.399,24.765 ; v1(52.197,53.34) 52,53.34 51.529,52.869 49.022,52.869
pads on no net: B1.5 PGA1.29 PGA2.29

## Silkscreen, mask and mechanical layers (free items; w line width, h text height)
Top Overlay:
  circle w0.2: c33.782,43.688 r0.05
  circle w0.2: c43.053,46.355 r0.05
  circle w0.2: c65.659,65.024 r0.05
  circle w0.2: c58.42,49.911 r0.05
  circle w0.2: c55.499,45.974 r0.05
  circle w0.2: c63.373,47.117 r0.05
  circle w0.2: c63.5,42.926 r0.05
  circle w0.2: c57.785,42.672 r0.05
  circle w0.2: c55.372,42.926 r0.05
  circle w0.2: c66.167,42.037 r0.05
  circle w0.2: c65.786,50.927 r0.05
  circle w0.2: c66.167,46.482 r0.05
  circle w0.2: c37.084,54.483 r0.05
  circle w0.2: c39.37,46.355 r0.05
  circle w0.2: c62.611,13.97 r0.05
  circle w0.2: c65.659,36.449 r0.05
  circle w0.2: c65.405,22.098 r0.05
  circle w0.2: c62.484,18.034 r0.05
  circle w0.2: c65.278,13.843 r0.05
  circle w0.2: c57.531,13.97 r0.05
  circle w0.2: c67.31,15.494 r0.05
  circle w0.2: c55.118,17.282 r0.05
  circle w0.2: c58.293,21.082 r0.05
  circle w0.2: c57.912,35.306 r0.05
  circle w0.2: c55.245,31.506 r0.05
  circle w0.2: c67.691,29.591 r0.05
  circle w0.2: c55.245,28.575 r0.05
  circle w0.2: c65.532,27.686 r0.05
  circle w0.2: c62.992,32.395 r0.05
  circle w0.2: c37.084,52.324 r0.05
  circle w0.2: c35.814,46.99 r0.05
  circle w0.2: c63.119,61.097 r0.05
  circle w0.2: c63.246,57.033 r0.05
  circle w0.2: c66.04,55.89 r0.05
  circle w0.2: c58.42,38.989 r0.05
  circle w0.2: c58.547,52.959 r0.05
  circle w0.2: c55.245,56.652 r0.05
  circle w0.2: c67.818,58.43 r0.05
  circle w0.2: c55.372,60.208 r0.05
  circle w0.2: c58.928,64.526 r0.05
  circle w0.2: c33.909,58.801 r0.05
  circle w0.2: c37.846,58.293 r0.05
  circle w0.2: c40.513,58.039 r0.05
  lines w0.254: 55.626,14.224 57.15,14.224 ; 55.626,16.012 57.15,16.012 ; 55.626,17.272 57.15,17.272 ; 55.626,19.05 57.15,19.05 ; 55.7,31.379 57.224,31.379 ; 55.7,33.411 57.224,33.411 ; 55.753,28.585 57.277,28.585 ; 55.753,30.617 57.277,30.617 ; 55.753,57.287 57.277,57.287 ; 55.753,58.811 57.277,58.811 ; 55.827,60.335 57.351,60.335 ; 55.827,61.859 57.351,61.859 ; 55.88,43.18 57.15,43.18 ; 55.88,44.704 57.15,44.704 ; 55.88,46.228 57.15,46.228 ; 55.88,47.752 57.15,47.752